# Altium PCB lather_front_panel.PcbDoc
Units mil, origin at the board's own origin, x right, y up, seen from the top; angles counter-clockwise.
Board outline 2690 x 1695 mil, 2 copper layers (Top Layer, Bottom Layer); 7 components, 9 nets, 53 pads, 2 vias.
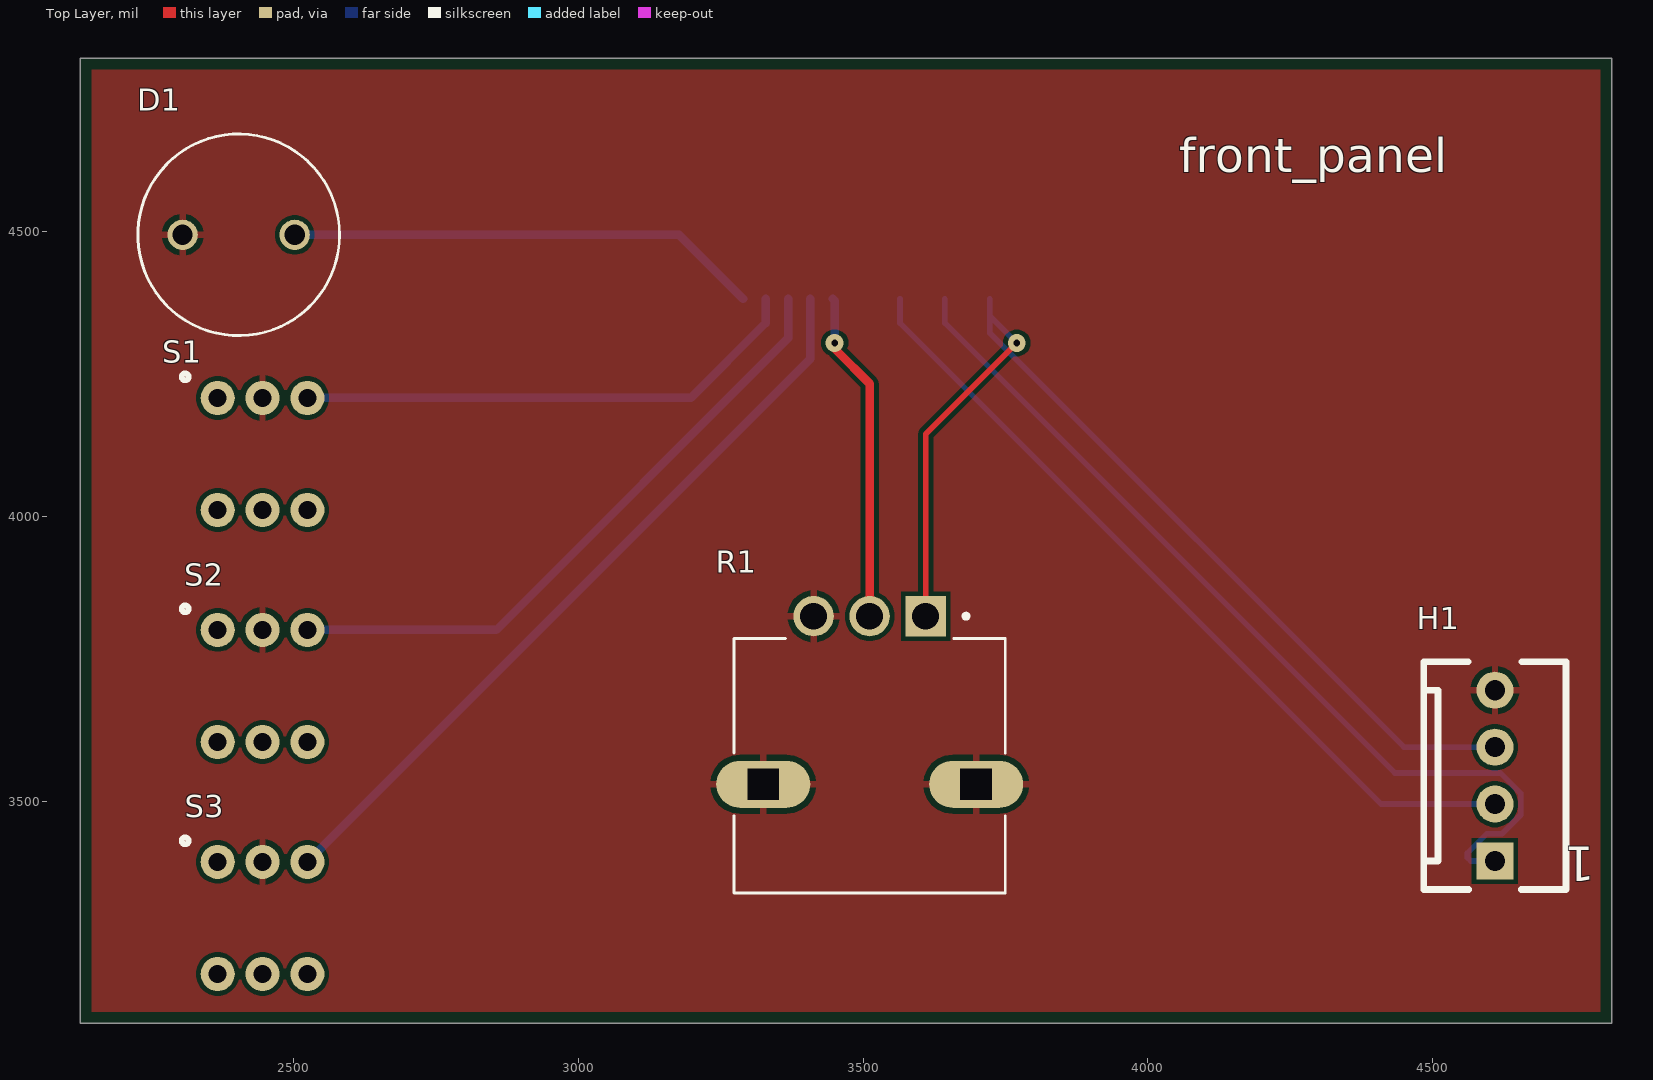
[diagram p0: Top Layer view]
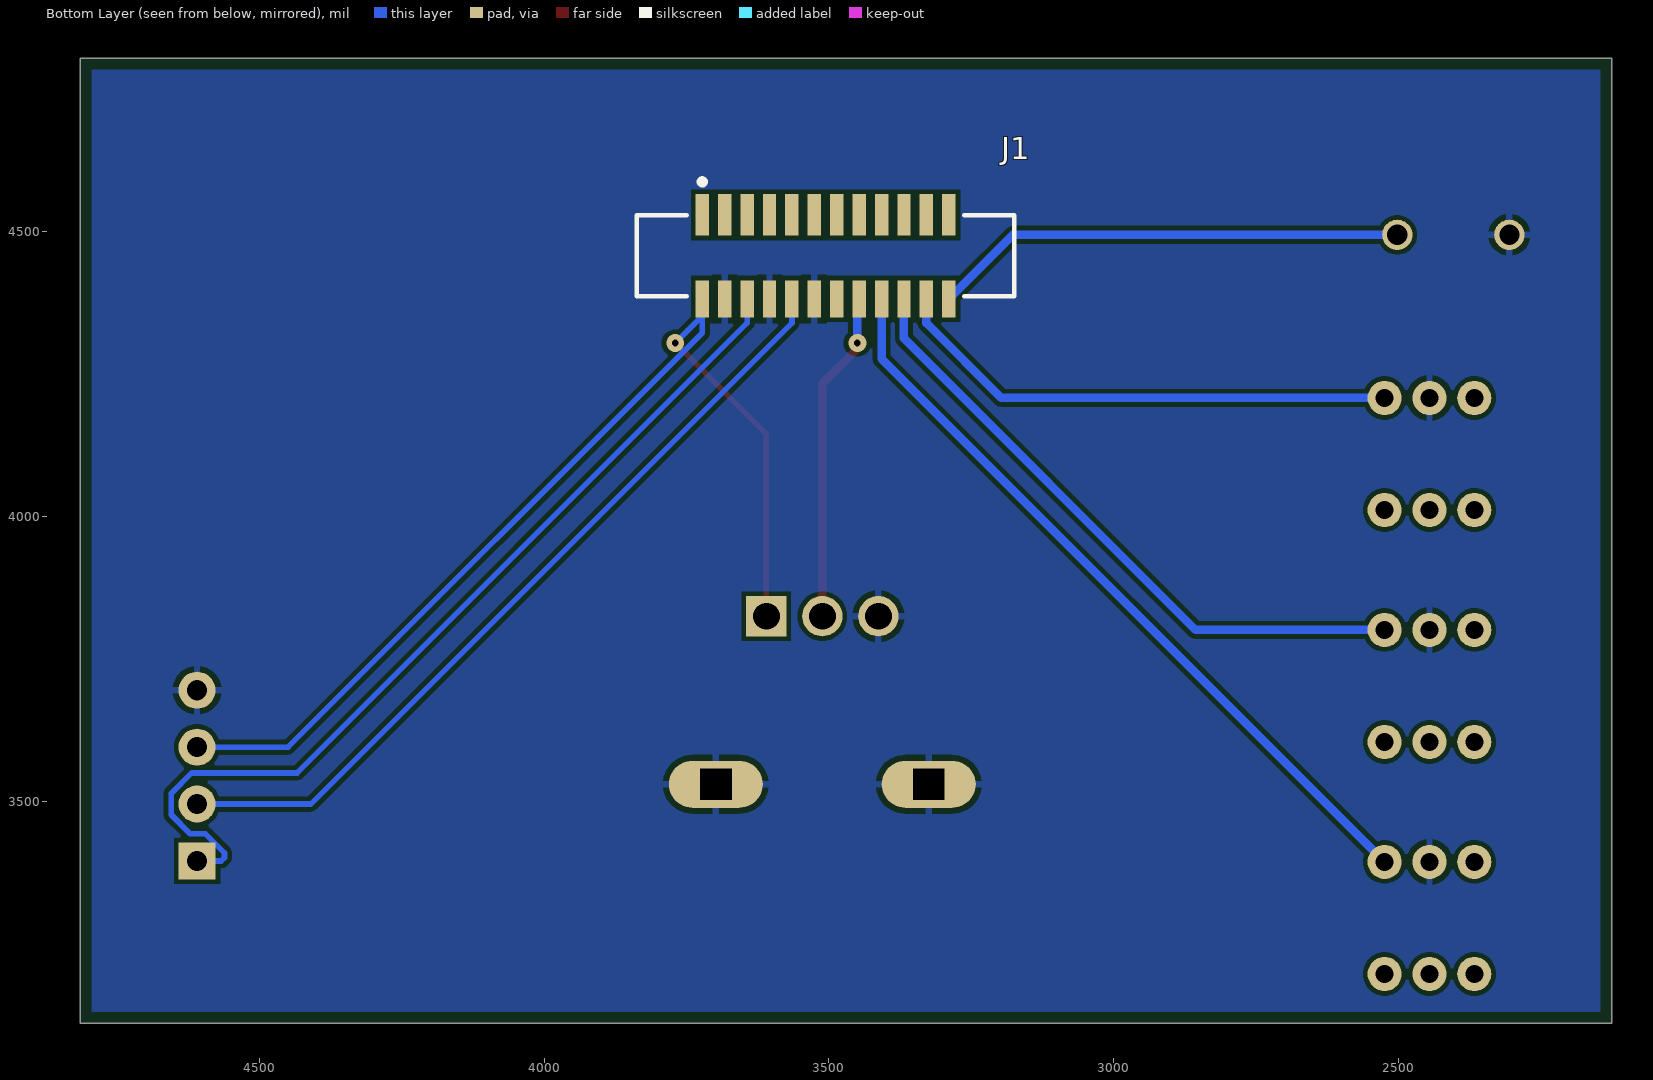
[diagram p1: Bottom Layer view, seen from below]
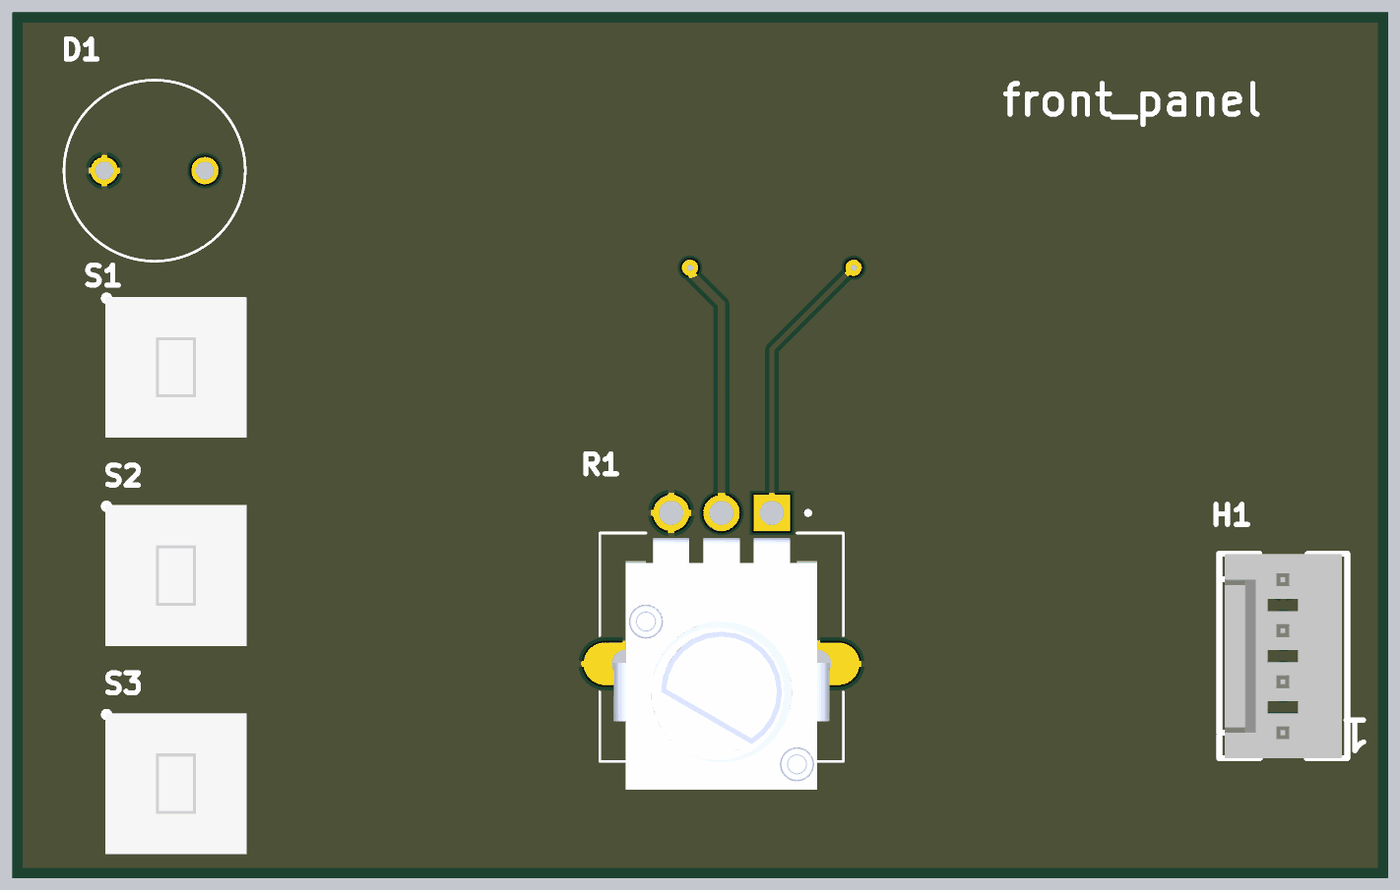
[diagram p2: 3D render of the assembled board from above, using the file's embedded part models]

## Layer stack, top to bottom
Top Solder: solder mask 0.4, Solder Resist, Dk 3.5
Top Layer: signal copper 1.4
Dielectric 1: dielectric 12.6, FR-4, Dk 4.8
Bottom Layer: signal copper 1.4
Bottom Solder: solder mask 0.4, Solder Resist, Dk 3.5

## Board outline
2125,3110 2125,4805 4815,4805 4815,3110

## Design rules (kind name [scope] priority, off if disabled: settings)
BoardOutlineClearance [All] p1: gap=19.68 ignorepadtopadclearanceinfootprint=FALSE
Clearance GND_POLY [InNamedPolygon('GND')] p1: gap=10 ignorepadtopadclearanceinfootprint=FALSE
Clearance Min_Clearance_Circuit_Labs [All] p2: gap=7.87 ignorepadtopadclearanceinfootprint=FALSE
FanoutControl Fanout_BGA [IsBGA] p1 off: bgadir=Out bgaviamode=Centered fanoutstyle=Auto fanoutdirection=Alternating viagrid=1 // Fanout_BGA (Default Rule)
Height [All] p1: minheight=0 maxheight=2000 prefheight=500
HoleSize [All] p1: absolutevalues=TRUE maxlimit=393.7 minlimit=11.81 maxpercent=80.000 minpercent=20.000
MinimumAnnularRing [All] p1: minimumring=3.94
MinimumSolderMaskSliver [All] p1: minsoldermaskwidth=4
NetAntennae [All] p1: netantennaetolerance=39.37
PolygonConnect [All] p1: connectstyle=Relief reliefconductorwidth=12 reliefentries=4 polygonreliefangle="90 Angle" airgapwidth=10
RoutingVias [All] p1: holewidth=19.68 width=39.37 viastyle="Through Hole" minholewidth=11.81 minwidth=31.5 maxholewidth=39.37 maxwidth=78.74
SMDNeckDown [All] p1 off: percent=50.000
SMDToCorner [All] p1: distance=98425
SMDToPlane [All] p1: distance=1968504
SilkToSolderMaskClearance SilkscreenOverComponentPads [IsPad] p1: minsilkscreentomaskgap=7.87 clearancetoexposedcopper=TRUE
SolderMaskExpansion [All] p1: expansion=4 istentingtop=FALSE
ViasUnderSMD [All] p1: allowed=FALSE
Width [All] p1: maxlimit=78.74 minlimit=7.87 preferedwidth=11.81
24 further rules are at their usual default settings.

## Components (designator, comment, footprint, x,y, rotation, side; value= is the part's Value field where it differs from the comment)
D1 "RGB LED" INDRD500W70D900H1220 2403.13,4495 r0 top
H1 "4 Pin Molex KK Hdr" MOLEX_KK_4_HDR 4610,3395 r90 top
J1 "52610-1272" MOLX-52610-1272 3505.94,4456.18 r180 bottom
R1 "P0915N-FC15BR100K" TRIM_P0915N-FC15BR100K 3511.57,3529.72 r180 top
S1 "DPDT Switch" TL2230EEF100 2445,4110 r0 top
S2 "DPDT Switch" TL2230EEF100 2445,3702.5 r0 top
S3 "DPDT Switch" TL2230EEF100 2445,3295 r0 top

## Footprints (in the part's own frame and the unit in brackets; to place one, negate y for a bottom-side part, rotate by r counter-clockwise, add the part's x,y. Pads: shape width x height; smd on the part's side, far side on the other; paste and mask are expansions set on the pad)
INDRD500W70D900H1220 [mm]
  round 1.35 hole 0.9: 1(-2.5,0) 2(2.5,0)
  silkscreen extent -4.5,-4.5 4.5,4.5
MOLEX_KK_4_HDR [mil] "MOLEX_KK_4_HDR"
  rect 65x65 hole 35.43: 1(0,0)
  round 65 hole 35.43: 2(100,0) 3(200,0) 4(300,0)
  silkscreen extent -50,-125 350,125, body extent -50,-114 350,114, height 461
MOLX-52610-1272 [mm] "FPC Connector, 12-Leads, Vertical, Pitch 1.0 mm, Mated Height 5.75 mm, SMT"
  rect 0.6x1.85 smd: 1A(-5.5,1.875) 2A(-4.5,1.875) 3A(-3.5,1.875) 4A(-2.5,1.875) 5A(-1.5,1.875) 6A(-0.5,1.875) 7A(0.5,1.875) 8A(1.5,1.875) 9A(2.5,1.875) 10A(3.5,1.875) 11A(4.5,1.875) 12A(5.5,1.875)
  rect 0.6x1.65 smd: 1B(-5.5,-1.875) 2B(-4.5,-1.875) 3B(-3.5,-1.875) 4B(-2.5,-1.875) 5B(-1.5,-1.875) 6B(-0.5,-1.875) 7B(0.5,-1.875) 8B(1.5,-1.875) 9B(2.5,-1.875) 10B(3.5,-1.875) 11B(4.5,-1.875) 12B(5.5,-1.875)
  silkscreen extent -8.43,-1.75 8.43,3.47, body extent -9.3,-2.24 9.3,2.26, height 5.76
TL2230EEF100 [mm] "SWITCH PUSHBUTTON DPDT 0.1A 30V"
  round 1.524 hole 0.8: 1(-2,2.5) 2(0,2.5) 3(2,2.5) 4(-2,-2.5) 5(0,-2.5) 6(2,-2.5)
  silkscreen extent -3.6,3.28 -3.29,3.6, body extent -3.5,-3.5 3.5,3.5, height 11.75
TRIM_P0915N-FC15BR100K [mm]
  rect 1.8x1.8 hole 1.2: 1(-2.5,-7.5)
  round 1.8 hole 1.2: 2(0,-7.5) 3(2.5,-7.5)
  oval 4.2x2.1 hole 1.4 square: S1(-4.75,0) S2(4.75,0)
  silkscreen extent -6.05,-7.6 6.05,4.85, body extent -6.05,-6.25 6.05,6.25, height 26

## Part data
H1: library part JA_MOLEX_KK_4POS, "CONN HEADER 4POS 2.54mm VERT_Thru Hole", Manufacturer=Molex, Manufacturer PN=22-23-2041, Supplier Part Number 1=9731164, Storage Location="ECE Dept Store", Supplier="ECE Dept", Supplier 1=Farnell
J1: library part CMP-1241-00323-1, "1.0 mm Pitch Easy-On(TM) Type FPC Connector, 5.75 mm Mated Height, Vertical, ZIF, SMT, 12 Circuits, -40 to 85 degC, ELV and RoHS Compliant, Tape and Reel", Current (Max per Contact)=1A, Manufacturer=Molex, Voltage (Max)="125V AC (RMS)/DC", Circuits (Loaded)=12, ComponentLink1Description="Manufacturer URL", ComponentLink1URL=http://www.molex.com/molex/index.jsp, ComponentLink2Description=Datasheet, ComponentLink2URL=http://www.molex.com/webdocs/datasheets/pdf/en-us/0526101272_FFC_FPC_CONNECTORS.pdf, ComponentLink3Description="Package Specification", ComponentLink3URL=http://www.molex.com/pdm_docs/sd/526101272_sd.pdf, Contact Position=N/A, Durability (mating cycles max)=30, Entry Angle=Vertical, Mated Height=5.75mm, Material - Metal="Phosphor Bronze", Material - Plating Mating=Gold, Material - Plating Termination=Tin, Mounting Technology="Surface Mount", Number of Rows=1, Orientation=Vertical, PackageDescription="12-Lead FPC Connector, Pitch 1.0 mm", PackageReference=52610-1272, PackageVersion="Rev. G, 02/2012", Packing="Tape and Reel", PartNumber=52610-1272, PCB Locator=No, PCB Retention=None, Pitch - Mating Interface=1.00mm, Polarized to PCB=No, RoHS=TRUE, Stackable=No
R1: "100k Ohm 1 Gang Linear Panel Mount Potentiometer None 1 Kierros Conductive Plastic 0.05W, 1/20W PC Pins, Board Locks", Package=None, Availability=Warning, Check_prices=https://www.snapeda.com/parts/P0915N-FC15BR100K/TT%20Electronics/BI/view-part/1438723/?ref=eda, MF="TT Electronics/BI", MP=P0915N-FC15BR100K, Price=None, Purchase-URL=https://pricing.snapeda.com/search/part/P0915N-FC15BR100K/?ref=eda, SnapEDA_Link=https://www.snapeda.com/parts/P0915N-FC15BR100K/TT%20Electronics/BI/view-part/1438723/?ref=snap
S1 S2 S3: library part TL2230EEF100

## Via types
v1: diameter 31.5, hole 11.81, Top Layer to Bottom Layer, 2 vias

## Nets (pads, with @x,y where several pads share a name; then routed paths per layer and width w, separated by ;. In a path a pad name is that pad's centre, name@x,y a point inside that pad or via, vN(x,y) a via of type N, cw(c..) or ccw(c..) an arc to the next point about the centre after c; other vN are vias at no path point)
5V: H1.3 J1.1B R1.1 | length 1862.2
  Top Layer w10: R1.1 3610,4145 v1(3770,4305)
  Bottom Layer w10: J1.1B J1.1B@3722.48,4352.52 ; v1(3770,4305) J1.1B@3722.48,4352.52 ; H1.3 4450,3595 3722.48,4322.52 J1.1B@3722.48,4352.52
AUTO_EN: J1.9B S3.3 | length 1355
  Bottom Layer w15: S3.3 3407.52,4277.2 J1.9B
BUT_CC: J1.11B S1.3 | length 901.9
  Bottom Layer w15: S1.3 3197.17,4208.43 3328.78,4340.04 J1.11B
BUT_CCW: J1.10B S2.3 | length 1125.8
  Bottom Layer w15: S2.3 2855.93,3800.93 3368.15,4313.15 J1.10B
GND: D1.1 H1.4 J1.2B J1.4B J1.6B R1.3 R1.S1 R1.S2 S1.2 S2.2 S3.2
POT_IN: J1.8B R1.2 | length 584.2
  Top Layer w15: v1(3450,4305) 3453.16,4301.84 3453.16,4291.84 3511.57,4233.43 R1.2
  Bottom Layer w15: J1.8B 3450,4379.25 v1(3450,4305)
RGB_PWM: D1.2 J1.12B | length 834.5
  Bottom Layer w15: D1.2 3176.77,4495 J1.12B
SCL: H1.1 J1.3B | length 1614.1
  Bottom Layer w10: J1.3B 3643.74,4340.04 4434.15,3549.63 4619.54,3549.63 4655.37,3513.79 4655.37,3476.21 4621.84,3442.67 4595.33,3442.67 4561.8,3409.14 4561.8,3400.86 4567.66,3395 H1.1
SDA: H1.2 J1.5B | length 1437.3
  Bottom Layer w10: J1.5B 3565,4340.04 4410.04,3495 H1.2
pads on no net: J1.1A J1.2A J1.3A J1.4A J1.5A J1.6A J1.7A J1.7B J1.8A J1.9A J1.10A J1.11A J1.12A S1.1 S1.4 S1.5 S1.6 S2.1 S2.4 S2.5 S2.6 S3.1 S3.4 S3.5 S3.6

## Polygon pours and split planes (outlines as drawn)
GND on Bottom Layer "GND_L02_P000" (solid, pour order 0): 2125,4805 4815,4805 4815,3110 2125,3110
GND on Top Layer "GND_L01_P001" (solid, pour order 1): 2120,4810 4810,4810 4810,3115 2120,3115

## Silkscreen, mask and mechanical layers (free items; w line width, h text height)
Top Overlay:
  text "front_panel" at 4055,4604.99 h60
Board Outline:
  the board outline again, w10

## Text inside footprints (layer, text, board x,y; h text height)
H1: Top Overlay "1" at 4785,3420 h60 r180